# EAGLE board smart_home_security_model (EAGLE 9.7.0)

Size 251.04 x 86.12 mm. Coordinates in mm from the lower left corner, seen from the top.
Outline: 0,0 251.04,0 251.04,86.12 0,86.12 0,0
Copper layers (1*16): Top 0.035mm / dielectric 1.5mm / Bottom 0.035mm
Design rules "default": minimum track width 6mil, minimum drill 0.35mm, track to track 6mil, track to pad 6mil, pad to pad 6mil, via to via 6mil, smd to smd 6mil, copper to edge 40mil, drill to drill 6mil, minimum pad ring 10mil, minimum via ring 8mil, stop-mask expansion 4mil, vias tented up to drill 0mil, thermal gap 10mil

## Footprints (pad centres in the part's own frame; a part is rotated, then mirrored left to right if it is on the bottom)
LEDRD254W60D565H860B = drill 0.981 pad 1.581: 1 -1.27,0; 2 1.27,0
LED-RGB-5MM = drill 0.9: B 0.635,0.635; C -0.635,-0.635; G 1.905,-0.635; R -1.905,0.635
PIEZO = drill 1 pad 1.6: 1 -3.5,0; 2 3.5,0
28027 = drill 1.016 long: 1 -2.54,0; 2 0,0; 3 2.54,0
RESAD1016W63L850D250B = drill 0.83 pad 1.43: 1 -5.08,0; 2 5.08,0
SWITCH-SPDT-PTH-8.5X3.7MM = drill 1.016 pad 1.88: 1 -2.54,0; 2 0,0; 3 2.54,0
SG90 = drill 1.016 long: 1 -2.54,0; 2 0,0; 3 2.54,0
ARDUINO-UNO-R3-SHIELD = drill 1.016 pad 1.88: 3.3V 24.13,-2.54; 5V 24.13,0; A0 24.13,12.7; A1 24.13,15.24; A2 24.13,17.78; A3 24.13,20.32; A4 24.13,22.86; A5 24.13,25.4; AREF -24.13,-13.97; D2 -24.13,20.32; D3 -24.13,17.78; D4 -24.13,15.24; D5 -24.13,12.7; D6 -24.13,10.16; D7 -24.13,7.62; D8 -24.13,3.81; D9 -24.13,1.27; D10 -24.13,-1.27; D11 -24.13,-3.81; D12 -24.13,-6.35; D13 -24.13,-8.89; GND@0 24.13,2.54; GND@1 24.13,5.08; GND@2 -24.13,-11.43; IOREF 24.13,-7.62; NC 24.13,-10.16; RES 24.13,-5.08; RX -24.13,25.4; SCL -24.13,-19.05; SDA -24.13,-16.51; TX -24.13,22.86; VIN 24.13,7.62

## Placement (x,y rotation side)
D2  RED  [LEDRD254W60D565H860B]  59.57,64.14 0 top
D4  LED-RGBRCBG-PTH  [LED-RGB-5MM]  135.25,32.54 180 top
PIEZO2  PIEZO  [PIEZO]  42.81,70.49 180 top
PIR1  PIR-SENSOR_28027  [28027]  167.09,34.24 0 top
R1  1k  [RESAD1016W63L850D250B]  131.44,27.46 90 top
R2  1k  [RESAD1016W63L850D250B]  58.3,59.05 90 top
R3  1k  [RESAD1016W63L850D250B]  139.06,27.46 90 top
S1  TOGGLE  [SWITCH-SPDT-PTH-8.5X3.7MM]  243.63,79.13 0 top
SERVO1  SERVOSG90  [SG90]  167.03,24.46 180 top
U1  ARDUINO-UNO-R3-SHIELD  [ARDUINO-UNO-R3-SHIELD]  47.88,29.84 270 top

## Library data of the parts
D2 = Tinkercad; CATEGORY: Opto-Electronic; SUB-CATEGORY: LED; VALUE: LED_RED
D4 PIEZO2 PIR1 R1-R3 S1 SERVO1 U1 = Tinkercad

## Nets
D2_A: D2.1 R2.2
D4_G: D4.G R1.2
D4_R: D4.R R3.2
U1_5V: PIR1.2 SERVO1.2 U1.5V
U1_D2: S1.3 U1.D2
U1_D3: PIR1.1 U1.D3
U1_D4: SERVO1.3 U1.D4
U1_D5: D2.2 U1.D5
U1_D6: R2.1 U1.D6
U1_D9: PIEZO2.1 U1.D9
U1_D11: R1.1 U1.D11
U1_D12: R3.1 U1.D12
U1_GND: D4.C PIEZO2.2 PIR1.3 S1.1 SERVO1.1 U1.GND@0 U1.GND@1 U1.GND@2
U1_TX: S1.2 U1.TX

## Tracks (layer width: path | path; a pad name or v marks a point on that pad's centre or on a via)
D2_A  (1 unrouted)
D4_G  (1 unrouted)
D4_R  (1 unrouted)
U1_5V  (2 unrouted)
U1_D2  (1 unrouted)
U1_D3  (1 unrouted)
U1_D4  (1 unrouted)
U1_D5  (1 unrouted)
U1_D6  (1 unrouted)
U1_D9  (1 unrouted)
U1_D11  (1 unrouted)
U1_D12  (1 unrouted)
U1_GND  (7 unrouted)
U1_TX  (1 unrouted)